# Altium PCB KeeWatch.PcbDoc (part 2 of 2)
Units mm, origin at the board's own origin, x right, y up, seen from the top; angles counter-clockwise.
Board outline 34.5 x 38.7 mm, 4 copper layers (Top Layer, Signal Layer 1, Signal Layer 2, Bottom Layer), stack 1.641 mm thick; 86 components, 93 nets, 417 pads, 196 vias.
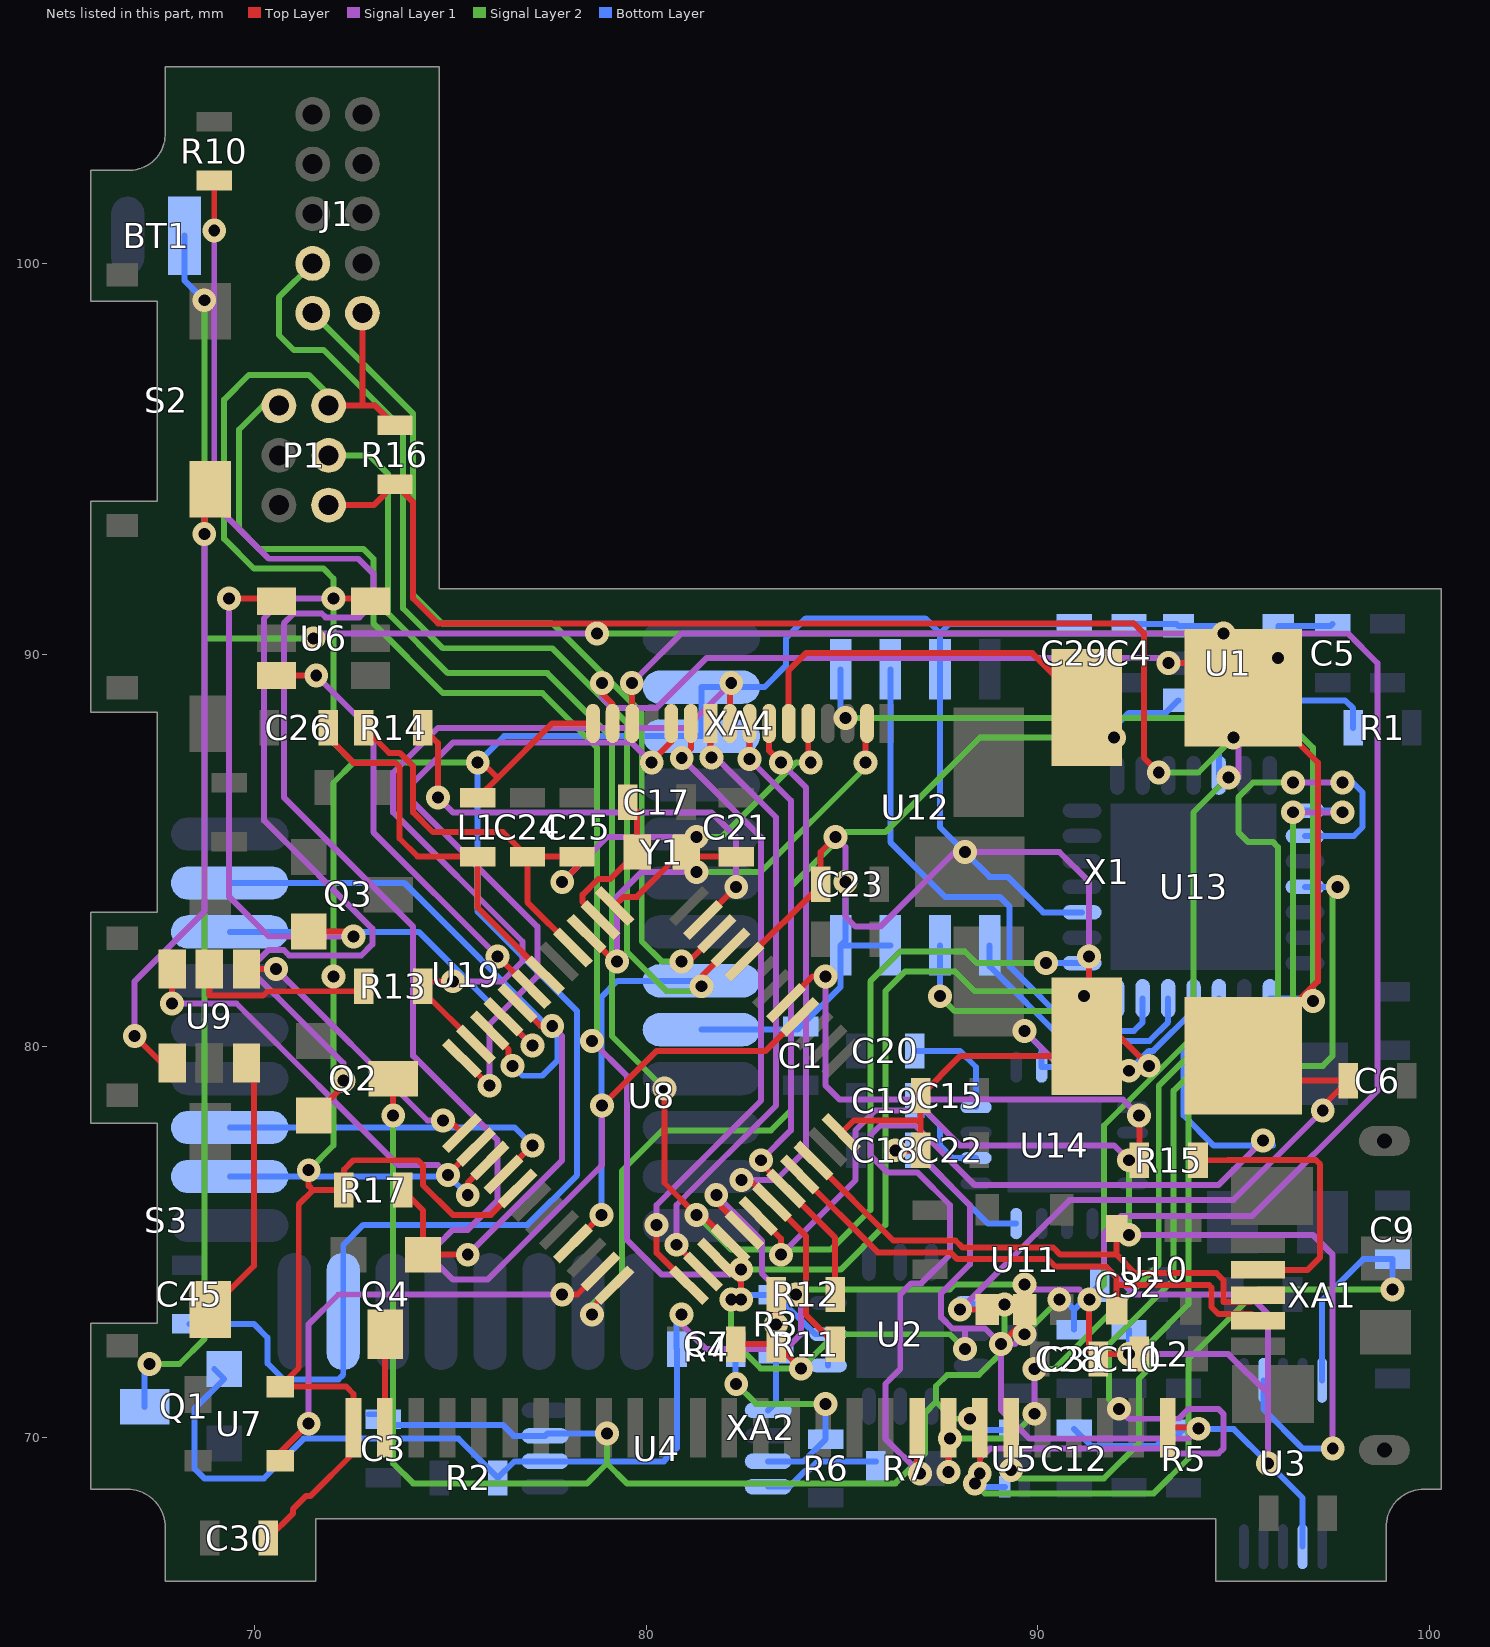
[diagram p4: the nets of this part, all layers, seen from the top]

## Via types
v1: diameter 0.61, hole 0.305, Top Layer to Signal Layer 1, 57 vias
v2: diameter 0.61, hole 0.305, Signal Layer 2 to Bottom Layer, 35 vias
v3: diameter 0.61, hole 0.305, Signal Layer 1 to Signal Layer 2, 34 vias
v4: diameter 0.5, hole 0.2, Top Layer to Bottom Layer, 24 vias
v5: diameter 0.61, hole 0.305, Top Layer to Signal Layer 2, 20 vias
v6: diameter 0.61, hole 0.305, Signal Layer 1 to Bottom Layer, 18 vias
v7: diameter 0.61, hole 0.305, Top Layer to Bottom Layer, 8 vias

## Nets (pads, with @x,y where several pads share a name; then routed paths per layer and width w, separated by ;. In a path a pad name is that pad's centre, name@x,y a point inside that pad or via, vN(x,y) a via of type N, cw(c..) or ccw(c..) an arc to the next point about the centre after c; other vN are vias at no path point) (continued)
NetQ2_3: Q2.3 U6.6 | length 20.8
  Top Layer w0.152: Q2.3@71.501,78.232 72.263,78.994 v1(72.263,79.121) ; v1(72.009,91.44) 72.889,91.44 U6.6@72.955,91.374
  Signal Layer 1 w0.152: v1(72.009,91.44) 70.739,91.44 70.231,90.932 70.231,85.772 73,83.004 73,82.604 72.717,82.321 70.875,82.321 70.742,82.455 70.342,82.455 70.059,82.172 70.059,81.772 72.263,79.568 v1(72.263,79.121)
NetQ3_3: Q3.3 U6.1 | length 13.7
  Top Layer w0.152: v1(69.342,91.44) 70.489,91.44 U6.1@70.555,91.374 ; Q3.3@71.374,82.931 72.39,82.931 v1(72.517,82.804)
  Signal Layer 1 w0.152: v1(69.342,91.44) 69.342,83.82 70.358,82.804 v1(72.517,82.804)
NetQ4_2: Q4.2 XA2.26 | length 2.4
  Top Layer w0.152: XA2.26@73.32,70.256 73.32,72.634 Q4.2@73.33,72.644
NetR1_1: R1.1 U1.5 | length 2.5
  Bottom Layer w0.152: U1.5@96.144,88.839 97.851,88.839 98.056,88.634 R1.1@98.056,88.138
NetR4_2: R4.2 R6.1 U4.3 | length 6
  Signal Layer 2 w0.152: v2(82.296,71.374) 82.804,70.866 v2(84.582,70.866)
  Bottom Layer w0.152: R4.2@82.284,72.263 82.284,71.386 v2(82.296,71.374) ; U4.3@83.114,69.398 84.015,69.398 R6.1@84.582,69.965 v2(84.582,70.866)
NetR7_1: R7.1 U4.4 | length 3
  Bottom Layer w0.152: U4.4@83.114,68.748 83.652,68.748 84.048,69.144 84.12,69.144 84.369,69.393 R7.1@85.868,69.393
NetS2_2: S2.2 U9.1 | length 16
  Top Layer w0.152: v1(66.929,80.264) 67.621,79.572 U9.1@67.884,79.572 ; v1(68.707,93.091) 68.707,94.078 S2.2@68.859,94.231
  Signal Layer 1 w0.152: v1(66.929,80.264) 66.929,81.661 68.707,83.439 v1(68.707,93.091)
NetS3_2: S3.2 U9.3 | length 6.8
  Top Layer w0.152: S3.2@68.859,73.276 69.977,74.393 69.977,79.379 U9.3@69.784,79.572
NetX1_2: X1.2 XA4.6 | length 9.7
  Top Layer w0.152: XA4.6@83.637,88.249 83.637,89.606 84.074,90.043 89.863,90.043 X1.2@91.25,88.656
PA00_XIN32: C21.1 U8.1 Y1.1 | length 3.7
  Top Layer w0.152: U8.1@79.182,83.584 79.419,83.82 79.756,83.82 80.899,84.963 Y1.1@81.016,84.963 81.131,84.848 C21.1@82.296,84.848
PA01_XOUT32: C17.1 U8.2 Y1.2 | length 4
  Top Layer w0.152: U8.2@78.829,83.23 78.374,83.685 78.374,83.875 78.773,84.274 79.077,84.274 Y1.2@79.766,84.963 79.766,85.989 C17.1@79.522,86.233
PA02_AIN0: U8.3 XA4.2 | length 11.6
  Top Layer w0.152: U8.3@78.475,82.877 79.183,82.169 v1(79.248,82.169) ; v5(85.598,87.249) 85.598,88.21 XA4.2@85.637,88.249
  Signal Layer 1 w0.152: v1(79.248,82.169) 79.248,83.82 79.883,84.455 v3(81.28,84.455)
  Signal Layer 2 w0.152: v3(81.28,84.455) 82.931,84.455 85.598,87.122 v5(85.598,87.249)
PA03_AREFA: C24.2 C25.2 R14.1 U8.4 XA4.5 | length 19.7
  Top Layer w0.152: R14.1@72.783,88.138 73.425,87.496 73.696,87.496 74.041,87.151 74.041,85.979 74.549,85.471 76.339,85.471 C24.2@76.962,84.848 ; v1(77.851,84.201) 78.232,84.582 C25.2@78.232,84.848 C24.2@76.962,84.848 ; U8.4@78.122,82.523 76.962,83.683 C24.2@76.962,84.848 ; XA4.5@84.137,88.249 84.137,87.313 v5(84.201,87.249)
  Signal Layer 1 w0.152: v1(77.851,84.201) 78.994,85.344 v3(81.28,85.344)
  Signal Layer 2 w0.152: v3(81.28,85.344) 81.915,85.344 83.82,87.249 v5(84.201,87.249)
PA04_AIN4: U8.9 U19.28 | length 10
  Top Layer w0.152: U8.9@76.354,80.755 v7(77.089,80.02)
  Bottom Layer w0.152: U19.28@69.357,82.924 74.185,82.924 v7(77.089,80.02)
PA05_AIN5: U8.10 U19.29 | length 13.2
  Top Layer w0.152: U8.10@76,80.402 76.479,79.923 76.479,79.604 v7(76.581,79.502)
  Bottom Layer w0.152: U19.29@69.357,84.174 73.814,84.174 77.724,80.264 77.724,79.629 77.343,79.248 76.835,79.248 v7(76.581,79.502)
PA06_TCC1-W0: R13.2 U8.11 XA4.9 | length 21.7
  Top Layer w0.152: v1(75.057,81.661) 74.41,81.661 R13.2@74.283,81.534 74.283,81.412 U8.11@75.647,80.048 ; XA4.9@82.137,88.249 82.137,89.249 v1(82.169,89.281)
  Signal Layer 1 w0.152: v1(75.057,81.661) 76.327,81.661 76.835,82.169 76.835,82.677 73.533,85.979 73.533,86.995 74.676,88.138 81.026,88.138 v1(82.169,89.281)
PA07_TCC1_W1: U8.12 XA4.12 | length 18
  Top Layer w0.152: U8.12@75.293,79.695 v1(75.994,78.994) ; v1(80.137,87.249) 80.137,87.285 XA4.12@80.637,87.785
  Signal Layer 1 w0.152: v1(75.994,78.994) 75.994,80.566 77.216,81.788 77.216,83.058 74.041,86.233 74.041,86.741 75.057,87.757 79.629,87.757 v1(80.137,87.249)
PA08_TCC0-W0: U8.13 U9.4 | length 7.2
  Top Layer w0.152: U9.4@69.784,81.972 v1(70.542,81.972) ; v1(74.803,78.105) 74.974,78.105 U8.13@75.293,77.785
  Signal Layer 1 w0.152: v1(70.542,81.972) 74.409,78.105 v1(74.803,78.105)
PA09_TCC0-W1: U8.14 U9.6 | length 10.8
  Top Layer w0.152: v1(67.884,81.092) U9.6@67.884,81.972 ; v1(74.93,76.708) 74.93,76.715 U8.14@75.647,77.432
  Signal Layer 1 w0.152: v1(67.884,81.092) 69.53,81.092 73.66,76.962 74.676,76.962 v1(74.93,76.708)
PA10_TCC0-W2: U8.15 U19.23 | length 7.4
  Top Layer w0.152: v7(75.438,76.2) 75.438,76.516 U8.15@76,77.078
  Bottom Layer w0.152: U19.23@69.357,76.674 74.964,76.674 v7(75.438,76.2)
PA11_TCC0-W3: U8.16 U19.24 | length 9
  Top Layer w0.152: U8.16@76.354,76.725 76.354,76.735 v7(77.089,77.47)
  Bottom Layer w0.152: U19.24@69.357,77.924 76.635,77.924 v7(77.089,77.47)
PA13_GPIO: U8.21 U19.8 | length 9.3
  Top Layer w0.152: U8.21@78.122,74.957 v7(78.857,75.692)
  Bottom Layer w0.152: v7(78.857,75.692) 78.857,81.27 79.261,81.674 U19.8@81.407,81.674
PA14_TCC0-W4: U7.3 U8.23 | length 11.8
  Top Layer w0.152: U7.3@70.646,69.408 70.646,69.63 v1(71.374,70.358) ; v1(77.851,73.66) 78.239,73.66 U8.23@78.829,74.25
  Signal Layer 1 w0.152: v1(71.374,70.358) 71.374,72.898 72.136,73.66 v1(77.851,73.66)
PA15_TCC0-W5: U1.1 U8.24 | length 27.8
  Top Layer w0.152: v5(78.613,73.152) 78.613,73.327 U8.24@79.182,73.896
  Signal Layer 2 w0.152: v5(78.613,73.152) 78.613,73.406 79.375,74.168 79.375,76.813 80.413,77.851 83.185,77.851 83.693,78.359 83.693,84.074 85.09,85.471 86.106,85.471 88.519,87.884 v2(91.948,87.884)
  Bottom Layer w0.152: v2(91.948,87.884) 91.821,88.011 92.329,88.519 93.274,88.519 U1.1@93.594,88.839
PA16_TCC2-W0: U8.25 XA4.11 | length 16.7
  Top Layer w0.152: v1(80.264,75.438) 80.264,74.724 U8.25@81.092,73.896 ; v1(80.905,87.37) 81.137,87.602 XA4.11@81.137,88.249
  Signal Layer 1 w0.152: v1(80.264,75.438) 80.264,75.946 82.931,78.613 82.931,85.344 v1(80.905,87.37)
PA17_TCC2-W1: U8.26 XA4.10 | length 16.1
  Top Layer w0.152: v1(80.772,74.93) 80.772,74.923 U8.26@81.445,74.25 ; XA4.10@81.637,88.249 81.637,87.4 v1(81.661,87.376)
  Signal Layer 1 w0.152: v1(80.772,74.93) 80.772,75.946 83.312,78.486 83.312,85.852 81.788,87.376 v1(81.661,87.376)
PA18_TCC3-W0: P1.2 U8.27 U13.14 | length 51.1
  Top Layer w0.152: U8.27@81.799,74.603 82.423,73.979 v1(82.423,73.533)
  Signal Layer 1 w0.152: v3(78.613,80.137) 79.502,79.248 79.502,75.057 80.391,74.168 v3@82.296,74.168 ; v1(82.423,73.533) v3(82.423,74.295)
  Signal Layer 2 w0.152: P1.2@70.612,96.368 70.206,96.368 69.596,95.758 69.596,93.218 70.104,92.71 72.771,92.71 73.025,92.456 73.025,90.805 74.803,89.027 77.343,89.027 78.74,87.63 78.74,80.264 v3(78.613,80.137) ; v3(82.423,74.295) 84.963,74.295 86.106,75.438 86.106,81.407 86.614,81.915 87.884,81.915 88.392,81.407 91.059,81.407 v2(91.186,81.28)
  Bottom Layer w0.152: v2(91.186,81.28) 91.313,81.153 91.959,81.153 U13.14@92.03,81.224
PA19_TCC3-W1: P1.3 U8.28 U13.15 | length 43.5
  Top Layer w0.152: v5(80.465,78.92) 80.465,76.507 v5(81.28,75.692) 81.417,75.692 U8.28@82.152,74.957
  Signal Layer 2 w0.152: P1.3@71.882,95.098 72.923,95.098 73.406,94.615 73.406,91.059 74.93,89.535 77.47,89.535 79.121,87.884 79.121,80.264 v5(80.465,78.92) ; v5(81.28,75.692) 82.169,74.803 84.709,74.803 85.725,75.819 85.725,81.661 86.487,82.423 88.138,82.423 88.437,82.124 v2(90.215,82.124)
  Bottom Layer w0.152: v2(90.215,82.124) U13.15@91.13,82.124
PA20_TCC0-W6: 
PA21_TCC0-W7: 
PA22_S3_I2C_SDA: R11.2 U8.31 XA4.7 | length 18.6
  Top Layer w0.152: v1(82.431,76.583) 82.647,76.583 U8.31@83.213,76.018 84.074,75.157 84.074,73.14 R11.2@84.824,72.39 ; XA4.7@83.137,88.249 83.137,87.551 v1(83.439,87.249)
  Signal Layer 1 w0.152: v1(82.431,76.583) 83.314,76.583 84.074,77.343 84.074,86.614 v1(83.439,87.249)
PA23_S3_I2C_SCL: R12.2 U8.32 XA4.8 | length 16.1
  Top Layer w0.152: v1(82.637,87.336) XA4.8@82.637,88.249 ; v1(82.931,77.089) 82.931,77.007 U8.32@83.566,76.371 84.824,75.114 R12.2@84.824,73.66
  Signal Layer 1 w0.152: v1(82.637,87.336) 83.693,86.28 83.693,77.851 v1(82.931,77.089)
PA28_USB_HOST_EN: R15.2 U8.41 | length 13.6
  Top Layer w0.152: U8.41@83.566,81.109 84.246,81.788 v1(84.582,81.788) ; v1(92.583,78.232) 92.595,78.22 R15.2@92.595,77.089
  Signal Layer 1 w0.152: v1(84.582,81.788) 84.582,78.994 84.938,78.638 92.177,78.638 v1(92.583,78.232)
PA30_SWCLK: J1.4 U8.45 | length 27.4
  Top Layer w0.152: v5(81.407,81.534) 81.407,81.778 U8.45@82.152,82.523
  Signal Layer 2 w0.152: J1.4@71.476,100 70.612,99.136 70.612,98.171 70.993,97.79 71.755,97.79 73.787,95.758 73.787,91.186 74.803,90.17 77.597,90.17 79.502,88.265 79.502,82.423 80.518,81.407 81.28,81.407 v5(81.407,81.534)
PA31_SWDIO: J1.2 U8.46 | length 23.6
  Top Layer w0.152: v5(80.899,82.169) 81.091,82.169 U8.46@81.799,82.877
  Signal Layer 2 w0.152: J1.2@71.476,98.73 74.041,96.164 74.041,91.534 74.77,90.805 77.597,90.805 79.883,88.519 79.883,82.677 80.391,82.169 v5(80.899,82.169)
PB02_AIN10: R14.2 U8.47 | length 12.5
  Top Layer w0.152: R14.2@74.283,88.138 74.676,87.745 v1(74.676,86.36) ; U8.47@81.445,83.23 81.452,83.23 v1(82.296,84.074)
  Signal Layer 1 w0.152: v1(74.676,86.36) 75.057,85.979 81.661,85.979 82.296,85.344 v1(82.296,84.074)
PB08_AIN2: U6.3 U8.7 | length 11.3
  Top Layer w0.152: U6.3@70.555,89.474 v1(71.567,89.474) ; v1(76.2,82.296) 77.034,81.462 U8.7@77.061,81.462
  Signal Layer 1 w0.152: v1(71.567,89.474) 73.025,88.016 73.025,85.471 v1(76.2,82.296)
PB09_AIN3: Q4.1 R17.2 U8.8 | length 11.1
  Top Layer w0.152: R17.2@73.775,76.327 74.295,75.807 Q4.1@74.295,74.676 v1(75.438,74.676) ; U8.8@76.708,81.109 77.298,80.518 v1(77.597,80.518)
  Signal Layer 1 w0.152: v1(75.438,74.676) 77.851,77.089 77.851,80.264 v1(77.597,80.518)
PWR1.8_OK: U3.2 U8.30 | length 28.1
  Top Layer w0.152: U8.30@82.859,75.664 83.439,75.084 v1(83.439,74.676)
  Signal Layer 1 w0.152: v1(83.439,74.676) 85.344,76.581 85.344,77.851 85.852,78.359 87.122,78.359 88.011,77.47 91.948,77.47 v3(92.329,77.089) ; v3(92.329,75.184) 97.028,75.184 97.536,74.676 v6(97.536,69.723)
  Signal Layer 2 w0.152: v3(92.329,75.184) v3(92.329,77.089)
  Bottom Layer w0.152: U3.2@95.766,71.467 95.766,70.731 96.774,69.723 v6(97.536,69.723)
PWR_SELECT: R3.2 U4.1 U8.29 | length 7.6
  Top Layer w0.152: v1(81.788,76.2) 81.706,76.2 81.661,76.155 U8.29@82.506,75.311
  Signal Layer 1 w0.152: v1(81.788,76.2) 82.956,75.032 82.956,74.193 83.312,73.838 v6(83.312,72.898)
  Bottom Layer w0.152: U4.1@83.114,70.698 83.312,70.896 R3.2@83.312,72.148 v6(83.312,72.898)
RD: U13.1 XA2.7 | length 32.2
  Top Layer w0.152: v1(88.519,69.088) XA2.7@88.52,70.256
  Signal Layer 1 w0.152: v1(88.519,69.088) 88.519,69.469 88.773,69.723 93.472,69.723 93.599,69.596 94.615,69.596 94.742,69.723 94.742,70.612 94.615,70.739 93.853,70.739 93.599,70.485 92.329,70.485 v3(92.075,70.739) ; v3(96.52,85.979) v6(97.79,85.979)
  Signal Layer 2 w0.152: v3(92.075,70.739) 91.821,70.993 91.821,72.39 93.472,74.041 93.472,78.867 94.488,79.883 96.012,79.883 96.52,80.391 v3(96.52,85.979)
  Bottom Layer w0.152: U13.1@96.83,86.024 97.745,86.024 v6(97.79,85.979)
RES: U13.10 XA2.9 | length 30
  Top Layer w0.152: XA2.9@86.92,70.256 86.92,69.163 v1(86.995,69.088)
  Signal Layer 1 w0.152: v1(86.995,69.088) 86.106,69.977 86.106,71.374 86.487,71.755 86.487,73.66 86.773,73.946 87.027,73.946 87.757,74.676 87.757,75.946 86.931,76.772 86.169,76.772 85.725,77.216 85.725,77.724 85.979,77.978 86.868,77.978 88.392,76.454 94.615,76.454 v6(95.758,77.597) v6@95.631,77.724
  Bottom Layer w0.152: U13.10@94.63,81.224 94.63,80.79 93.726,79.886 93.726,78.232 94.488,77.47 96.012,77.47 95.885,77.597 v6(95.758,77.597)
RESET: P1.5 R16.1 U13.26 | length 31.2
  Top Layer w0.152: P1.5@71.882,93.828 73.039,93.828 R16.1@73.577,94.365 74.041,93.901 74.041,91.44 74.676,90.805 92.456,90.805 92.71,90.551 92.71,87.376 v5(93.091,86.995)
  Signal Layer 2 w0.152: v5(93.091,86.995) 94.107,86.995 v2(94.996,87.884)
  Bottom Layer w0.152: U13.26@94.63,86.924 94.63,87.518 v2(94.996,87.884)
RS: U13.4 XA2.6 | length 23.5
  Top Layer w0.152: v5(89.32,69.176) XA2.6@89.32,70.256
  Signal Layer 2 w0.152: v5(89.32,69.176) 89.535,68.961 91.694,68.961 92.583,69.85 92.583,71.501 92.837,71.755 92.837,72.39 93.853,73.406 93.853,78.74 94.615,79.502 97.282,79.502 97.536,79.756 97.536,83.947 v2(97.663,84.074)
  Bottom Layer w0.152: U13.4@96.83,84.074 v2(97.663,84.074)
SAMD21_RESET: R10.2 U8.40 | length 49
  Top Layer w0.152: v1(68.961,100.838) R10.2@68.961,102.12 ; v1(78.867,78.486) 80.264,79.883 83.048,79.883 U8.40@83.92,80.755
  Signal Layer 1 w0.152: v1(68.961,100.838) 68.961,93.853 70.358,92.456 72.644,92.456 73.025,92.075 73.025,91.313 72.669,90.957 71.809,90.957 71.708,91.059 70.993,91.059 70.739,90.805 70.739,86.36 74.041,83.058 74.041,79.756 76.2,77.597 76.2,76.073 75.438,75.311 75.057,75.311 74.676,74.93 74.676,74.422 75.057,74.041 75.946,74.041 78.867,76.962 v1(78.867,78.486)
SCK: U12.6 U13.11 | length 9.5
  Signal Layer 2 w0.152: v2(87.503,81.28) 87.884,80.899 90.805,80.899 v2(92.329,79.375)
  Bottom Layer w0.152: v2(87.503,81.28) U12.6@87.503,82.581 ; v2(92.329,79.375) 92.837,79.883 92.955,79.883 93.98,80.908 U13.11@93.98,81.224
SDCS: U12.1 U13.8 | length 21.3
  Signal Layer 2 w0.152: v2(85.09,88.392) 96.266,88.392 97.028,87.63 v2(97.028,81.153) v2@97.028,81.026
  Bottom Layer w0.152: U12.1@84.963,89.631 84.963,88.519 v2(85.09,88.392) ; U13.8@95.93,81.224 96.957,81.224 v2(97.028,81.153)
SDI: U12.5 U13.12 | length 6.7
  Bottom Layer w0.152: U12.5@88.773,82.581 88.773,82.042 90.678,80.137 92.85,80.137 93.33,80.617 U13.12@93.33,81.224
SDO: U12.2 U13.13 | length 14.5
  Bottom Layer w0.152: U12.2@86.233,89.631 86.233,85.217 87.63,83.82 89.025,83.82 89.281,83.564 89.281,82.042 90.932,80.391 92.456,80.391 92.68,80.615 U13.13@92.68,81.224
TARGET_ID: R15.1 XA1.4 | length 7.3
  Top Layer w0.152: R15.1@94.095,77.089 94.862,77.089 94.863,77.09 97.11,77.09 97.214,76.986 97.214,74.608 96.895,74.289 XA1.4@95.631,74.289
TARGET_USB_N: U8.33 U10.3 XA1.2 | length 15
  Top Layer w0.152: U8.33@83.92,76.725 85.91,74.735 87.773,74.735 87.946,74.561 90.263,74.561 90.453,74.371 91.745,74.371 92.014,74.102 U10.3@92.014,73.245 92.014,73.905 94.37,73.905 94.437,73.838 94.437,73.34 94.616,73.162 95.458,73.162 XA1.2@95.631,72.989
TARGET_USB_P: U8.34 U10.2 XA1.3 | length 13.9
  Top Layer w0.152: U8.34@84.274,77.078 86.312,75.04 87.899,75.04 88.073,74.866 90.389,74.866 90.579,74.676 92.014,74.676 ; U10.2@92.014,75.345 92.014,74.676 ; XA1.3@95.631,73.639 95.458,73.467 94.742,73.467 94.742,74.031 94.563,74.209 92.481,74.209 92.014,74.676
"V+ BATTERY": BT1.1 C4.2 Q1.2 U1.3 | length 59.8
  Signal Layer 1 w0.152: v3(71.501,90.424) 71.628,90.551 v3(78.74,90.551)
  Signal Layer 2 w0.152: v2(67.31,71.882) 68.072,71.882 68.707,72.517 68.707,90.424 ; v2(68.707,99.06) 68.707,90.424 ; v3(71.501,90.424) 68.707,90.424 ; v3(78.74,90.551) v2(94.742,90.551)
  Bottom Layer w0.152: Q1.2@67.183,70.79 67.183,71.755 v2(67.31,71.882) ; BT1.1@68.199,100.711 68.199,99.568 v2(68.707,99.06) ; C4.2@92.329,90.793 93.54,90.793 U1.3@93.594,90.739 94.554,90.739 v2(94.742,90.551)
VCC: C9.1 U3.5 U5.4 | length 20.3
  Signal Layer 2 w0.152: v2(88.392,68.834) 88.646,68.58 92.964,68.58 93.853,69.469 93.853,72.009 95.631,73.787 v2(99.06,73.787)
  Bottom Layer w0.152: v2(88.392,68.834) 88.482,68.744 U5.4@89.158,68.744 ; U3.5@97.266,71.467 97.266,73.515 98.312,74.561 C9.1@99.06,74.561 v2(99.06,73.787)
VCC_P1V8: C10.2 C12.2 R5.1 U3.7 XA4.14 | length 62.4
  Top Layer w0.152: v1(79.629,89.281) 79.629,88.258 XA4.14@79.637,88.249
  Signal Layer 1 w0.152: v1(79.629,89.281) 80.899,90.551 97.917,90.551 98.679,89.789 98.679,78.867 95.479,75.667 92.129,75.667 91.694,75.231 91.694,74.422 92.456,73.66 95.377,73.66 95.885,73.152 95.885,71.12 ; v6(92.329,72.136) 94.869,72.136 95.885,71.12 ; v6(95.885,69.342) 95.885,71.12
  Bottom Layer w0.152: C12.2@90.932,70.219 91.36,69.791 93.042,69.791 93.372,70.121 93.628,70.121 R5.1@93.726,70.219 95.008,70.219 v6(95.885,69.342) 96.766,68.461 U3.7@96.766,67.217 ; v6(92.329,72.136) C10.2@92.329,72.759
VCC_P3V3: C1.1 C7.1 C15.1 C22.1 C23.1 C29.1 C30.1 C31.1 C32.1 C45.1 J1.1 L1.2 P1.1 R3.1 R11.1 R12.1 R13.1 R16.2 R17.1 U2.7 U2.8 U7.4 U8.17 U8.36 U8.44 U9.5 U11.2 U12.3 U12.7 U12.8 U13.17 U14.14 U14.15 U19.2 U19.3 U19.9 U19.20 X1.3 XA2.1 XA2.27 XA4.16 | length 193.5
  Top Layer w0.152: U9.5@68.834,81.972 68.834,81.294 70.208,81.294 70.32,81.407 72.009,81.407 ; C30.1@70.346,67.437 70.968,68.059 70.968,68.172 71.31,68.514 71.423,68.514 72.52,69.611 XA2.27@72.52,70.256 72.52,71.117 72.329,71.308 U7.4@70.646,71.308 71.12,71.782 71.12,75.964 71.483,76.327 ; v5(71.374,76.835) 71.374,76.436 71.483,76.327 ; P1.1@71.882,96.368 73.074,96.368 R16.2@73.577,95.865 ; v5(72.009,81.788) 72.009,81.407 ; 72.746,96.393 J1.1@72.746,98.73 ; R13.1@72.783,81.534 72.656,81.407 72.009,81.407 ; L1.2@75.692,86.348 76.2,86.856 ; v7(75.692,87.249) 75.807,87.249 76.2,86.856 ; U8.17@76.708,76.371 76.028,75.692 75.057,75.692 74.295,76.454 74.295,76.962 74.168,77.089 72.517,77.089 72.275,76.847 R17.1@72.275,76.327 71.483,76.327 ; XA4.16@78.637,88.249 77.593,88.249 76.2,86.856 ; C7.1@82.284,72.39 R11.1@83.324,72.39 ; U8.44@82.506,82.169 84.455,84.119 C23.1@84.455,84.143 84.455,84.963 v1(84.836,85.344) ; R12.1@83.324,73.66 R11.1@83.324,72.39 ; v5(83.947,71.767) R11.1@83.324,72.39 ; U8.36@84.981,77.785 85.3,78.105 87.007,78.105 ; v1(86.36,77.343) C22.1@87.007,77.343 ; C22.1@87.007,77.635 87.007,78.105 ; v1(89.058,72.39) 89.662,72.994 U11.2@89.662,73.274 ; v1(91.313,82.296) 91.313,80.319 X1.3@91.25,80.256 ; v1(92.837,79.502) 92.083,80.256 X1.3@91.25,80.256 ; XA2.1@93.32,70.256 94.082,70.256 v1(94.107,70.231) ; 87.007,78.105 C15.1@87.007,78.74 88.023,79.756 90.75,79.756 X1.3@91.25,80.256
  Signal Layer 1 w0.152: v1(84.836,85.344) 85.09,85.09 v6(85.09,84.201) 85.09,83.312 85.344,83.058 85.979,83.058 v6@87.884,84.963 ; v1(86.36,77.343) 86.868,77.343 88.265,75.946 88.265,74.426 87.533,73.694 87.533,73.074 87.816,72.791 88.138,72.791 ; v3(88.138,72.263) 88.138,72.791 ; v6(88.138,84.963) 90.551,84.963 91.313,84.201 v1(91.313,82.296) ; 89.408,72.39 v3(89.662,72.644) ; v6(89.662,80.391) 90.551,79.502 v1(92.837,79.502) ; v1(94.107,70.231) 93.853,69.977 89.789,69.977 89.058,70.708 v1(89.058,72.39) 88.657,72.791 88.138,72.791
  Signal Layer 2 w0.152: v5(71.374,76.835) 72.009,77.47 v5(72.009,81.788) 72.009,86.741 72.517,87.249 ; P1.1@71.882,96.368 71.882,96.647 71.374,97.155 69.85,97.155 69.215,96.52 69.215,92.964 69.977,92.202 71.755,92.202 72.009,91.948 72.009,87.757 72.517,87.249 ; v7(75.692,87.249) 72.517,87.249 ; v2(82.169,73.533) 82.169,72.517 82.919,71.767 v5(83.947,71.767) 84.824,72.644 87.757,72.644 v3(88.138,72.263) ; v3(89.662,72.644) v2(90.551,73.533)
  Bottom Layer w0.152: C45.1@68.326,72.91 69.971,72.91 70.322,72.558 70.322,71.898 70.733,71.487 72.132,71.487 72.257,71.612 U19.20@72.257,73.224 72.257,74.924 72.771,75.438 76.962,75.438 78.232,76.708 78.232,80.899 75.692,83.439 v7(75.692,87.249) 76.367,87.924 U19.3@81.407,87.924 U19.2@81.407,89.174 83.019,89.174 83.566,89.721 83.566,90.424 84.074,90.932 87.122,90.932 87.503,90.551 ; U19.9@81.407,80.424 83.865,80.424 C1.1@83.947,80.506 84.963,81.522 U12.8@84.963,82.581 ; v2(82.169,73.533) 82.169,73.636 82.181,73.648 R3.1@83.312,73.648 84.316,72.644 U2.8@84.647,72.644 U2.7@84.647,71.844 ; v6(85.09,84.201) 85.09,82.708 U12.8@84.963,82.581 ; U12.7@86.233,82.581 U12.8@84.963,82.581 ; v6(89.662,80.391) 90.099,79.954 U14.14@90.099,79.47 U14.15@90.749,79.47 ; v2(90.551,73.533) 90.666,73.533 90.932,73.267 ; C31.1@90.932,72.759 90.932,73.267 ; C29.1@90.932,90.793 87.745,90.793 87.503,90.551 ; U13.17@91.13,83.424 90.137,83.424 89.234,84.328 88.773,84.328 v6(88.138,84.963) 87.503,85.598 U12.3@87.503,89.631 87.503,90.551 ; C32.1@91.579,73.914 90.932,73.267
VCC_P-3V3: C6.1 U11.1 X1.4 X1.5 XA4.15 | length 45.9
  Top Layer w0.152: v1(78.867,89.281) 78.867,89.02 79.137,88.749 XA4.15@79.137,88.249 ; v1(88.016,73.274) U11.1@88.712,73.274 ; v1(93.345,89.789) 94.617,89.789 X1.4@95.25,89.156 97.155,87.251 97.155,81.661 X1.5@95.25,79.756 95.885,79.121 C6.1@97.929,79.121 97.282,78.474 v1(97.282,78.359)
  Signal Layer 1 w0.152: v1(78.867,89.281) 78.867,88.9 79.121,88.646 80.264,88.646 81.534,89.916 93.218,89.916 v1(93.345,89.789) ; v1(88.016,73.274) 90.815,76.073 94.996,76.073 v1(97.282,78.359)
VCC_USB: C5.1 C28.1 L2.1 Q1.1 R2.1 R4.1 U1.4 U4.6 | length 56.1
  Top Layer w0.152: v5(91.318,73.533) 91.313,73.528 91.313,72.243 C28.1@91.547,72.009 91.674,72.136 L2.1@92.595,72.136
  Signal Layer 1 w0.152: v6(80.899,73.152) 80.899,72.898 81.534,72.263 83.566,72.263 83.947,72.644 83.947,73.533 v3(83.82,73.66) ; v3(89.662,73.914) 89.789,73.787 91.064,73.787 v5(91.318,73.533) ; v3(94.869,86.868) 95.123,86.868 95.123,88.9 v6(96.139,89.916)
  Signal Layer 2 w0.152: v3(83.82,73.66) 83.947,73.787 87.757,73.787 87.884,73.914 v3(89.662,73.914) ; v5(91.318,73.533) 91.694,73.909 91.694,77.978 93.98,80.264 93.98,85.979 v3(94.869,86.868)
  Bottom Layer w0.152: Q1.1@68.961,71.755 69.215,71.501 68.453,70.739 68.453,69.215 68.707,68.961 70.231,68.961 71.247,69.977 75.201,69.977 R2.1@76.205,68.973 76.63,69.398 U4.6@77.414,69.398 80.447,69.398 80.784,69.735 R4.1@80.784,72.263 80.772,72.275 80.772,73.152 v6(80.899,73.152) ; v6(96.139,89.916) 96.144,89.921 U1.4@96.144,90.739 97.482,90.739 C5.1@97.536,90.793
VDDANA: C26.1 L1.1 U8.6 | length 10.1
  Top Layer w0.152: C26.1@71.87,88.138 71.87,87.896 72.524,87.242 73.591,87.242 73.695,87.138 73.695,85.309 74.156,84.848 L1.1@75.692,84.848 75.692,83.539 U8.6@77.415,81.816
VIN: C3.1 Q2.2 U2.1 U4.7 U5.1 | length 39.5
  Top Layer w0.152: v5(73.533,78.232) Q2.2@73.533,79.172
  Signal Layer 2 w0.152: v5(73.533,78.232) 73.533,69.342 74.041,68.834 78.486,68.834 78.994,69.342 ; v2(78.994,70.104) 78.994,69.342 ; v2(88.265,70.485) 87.837,70.485 87.401,70.92 ; v2(89.154,73.406) 89.154,72.263 88.494,71.603 87.684,71.603 87.401,71.32 87.401,70.92 ; 78.994,69.342 79.502,68.834 86.36,68.834 87.122,69.596 87.122,70.641 87.401,70.92
  Bottom Layer w0.152: C3.1@72.898,70.6 73.279,70.6 73.559,70.32 76.34,70.32 76.612,70.048 U4.7@77.414,70.048 77.47,70.104 v2(78.994,70.104) ; v2(88.265,70.485) 88.556,70.194 U5.1@89.158,70.194 ; U2.1@88.327,73.444 88.365,73.406 v2(89.154,73.406)
WR: U13.2 XA2.8 | length 30.5
  Top Layer w0.152: v1(87.72,69.125) XA2.8@87.72,70.256
  Signal Layer 1 w0.152: v1(87.72,69.125) 87.72,69.94 v3(87.757,69.977) ; v3(89.916,70.612) v3(89.916,71.755) ; v3(96.52,86.741) v3(97.79,86.741)
  Signal Layer 2 w0.152: v3(87.757,69.977) 89.281,69.977 v3(89.916,70.612) ; v3(89.916,71.755) 90.424,71.755 93.091,74.422 93.091,78.994 94.361,80.264 95.758,80.264 96.139,80.645 96.139,85.09 96.012,85.217 95.377,85.217 95.123,85.471 95.123,86.36 95.504,86.741 v3(96.52,86.741)
  Bottom Layer w0.152: U13.2@96.83,85.374 98.074,85.374 98.298,85.598 98.298,86.487 98.044,86.741 v3(97.79,86.741)
  other v2: 97.79,86.741
XOUT: C20.1 U14.12 | length 2.8
  Bottom Layer w0.152: C20.1@86.856,79.883 88.011,79.883 88.424,79.47 U14.12@88.424,78.445
YOUT: C19.1 U14.10 | length 2.5
  Bottom Layer w0.152: C19.1@86.856,78.613 87.503,77.966 87.503,77.47 87.828,77.145 U14.10@88.424,77.145
ZOUT: C18.2 U14.8 | length 3.4
  Bottom Layer w0.152: C18.2@86.856,77.343 88.729,75.47 U14.8@89.449,75.47
pads on no net: J1.6 J1.7 J1.8 P1. U2.9 U2.10 U2.11 U2.12 U6.4 U8.19 U8.20 U8.22 U8.37 U8.38 U8.39 U8.48 U13.27 U13.28 U14.1 U14.2 U14.4 U14.9 U14.11 U14.13 U14.16 U19.4 U19.5 U19.6 U19.7 U19.11 U19.12 U19.13 U19.14 U19.15 U19.16 U19.17 U19.18 U19.19 U19.22 U19.25 U19.26 U19.27 XA2.11 XA2.13 XA2.15 XA2.17 XA2.19 XA2.21 XA2.23 XA2.25
copper on no net: | length 0.6
  Top Layer w0.152: 87.037,71.543 v4(87.037,72.094)
  other v4: 85.937,72.094 85.937,73.194 87.037,73.194

## Polygon pours and split planes (outlines as drawn)
GND on Bottom Layer "GND" (solid, remove dead copper, pour order 4): 64.516,105.664 100.965,105.664 100.965,64.77 64.516,64.77
GND on Top Layer "GND" (solid, pour order 6): 64.516,105.918 101.092,105.918 101.092,66.04 101.092,65.659 64.516,65.659

## Keep-outs
Keep-Out Layer:
  lines w0.025: 65.807,68.685 66.807,68.685 cw(c66.722,67.699) 67.707,67.78 67.707,66.33 71.552,66.33 71.552,67.93 94.552,67.93 94.552,66.33 98.902,66.33 98.902,67.78 cw(c99.857,67.725) 99.802,68.68 100.302,68.68 100.302,91.567 74.707,91.567 74.707,105.03 67.707,105.03 67.707,103.28 cw(c66.785,103.302) 66.807,102.38 65.807,102.38 65.807,99.03 67.507,99.03 67.507,93.93 65.807,93.93 65.807,88.53 67.507,88.53 67.507,83.43 65.807,83.43 65.807,78.03 67.507,78.03 67.507,72.93 65.807,72.93 65.807,68.685

## Silkscreen, mask and mechanical layers (free items; w line width, h text height)
Bottom Paste:
  lines w0.1: 91.313,88.519 93.726,88.519
Mechanical 2:
  lines w0.013: 65.807,68.685 65.807,72.93 67.507,72.93 67.507,78.03 65.807,78.03 65.807,83.43 67.507,83.43 67.507,88.53 65.807,88.53 65.807,93.93 67.507,93.93 67.507,99.03 65.807,99.03 65.807,102.38 66.807,102.38 ccw(c66.785,103.302) 67.707,103.28 67.707,105.03 74.707,105.03 74.707,91.694 80.645,91.694 85.217,91.694 89.408,91.694 93.98,91.694 100.302,91.694 100.302,87.48 100.302,68.68 99.802,68.68 ccw(c99.857,67.725) 98.902,67.78 98.902,66.33 95.302,66.33 94.552,66.33 94.552,67.93 71.552,67.93 71.552,66.33 70.802,66.33 67.707,66.33 67.707,67.78 ccw(c66.722,67.699) 66.807,68.685 65.807,68.685